# EAGLE board Arduino_on_a_PCB_v22 (1) (EAGLE 9.7.0)
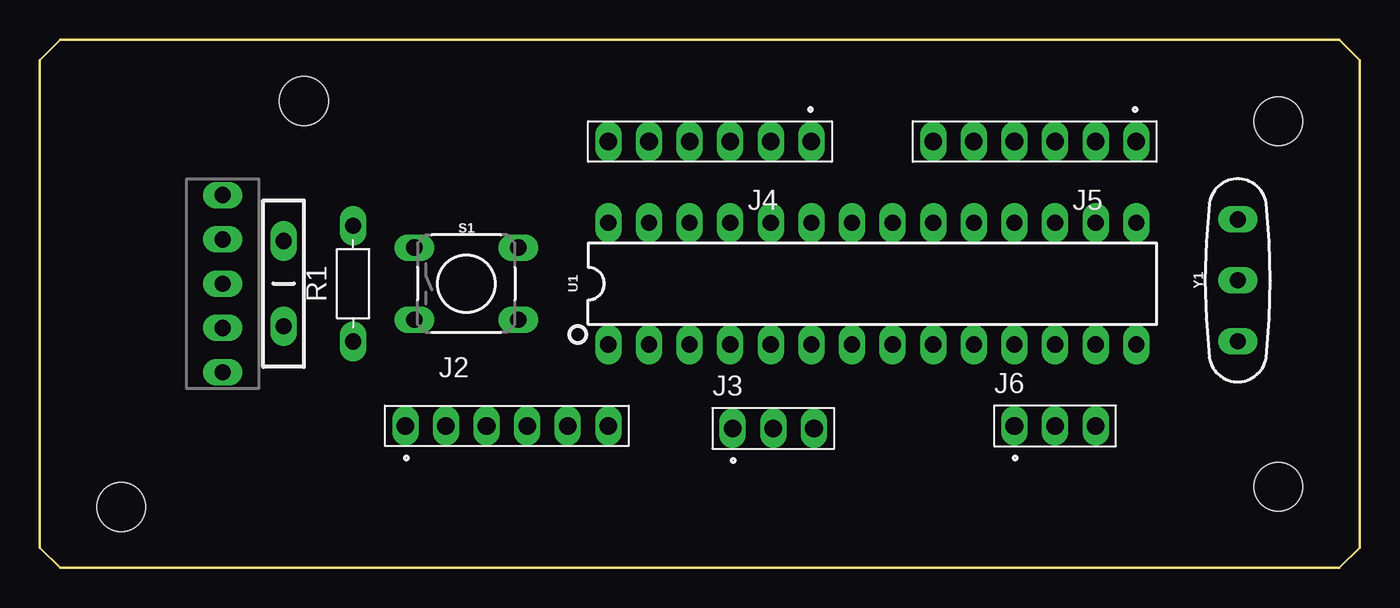
[diagram p0: board, top side]
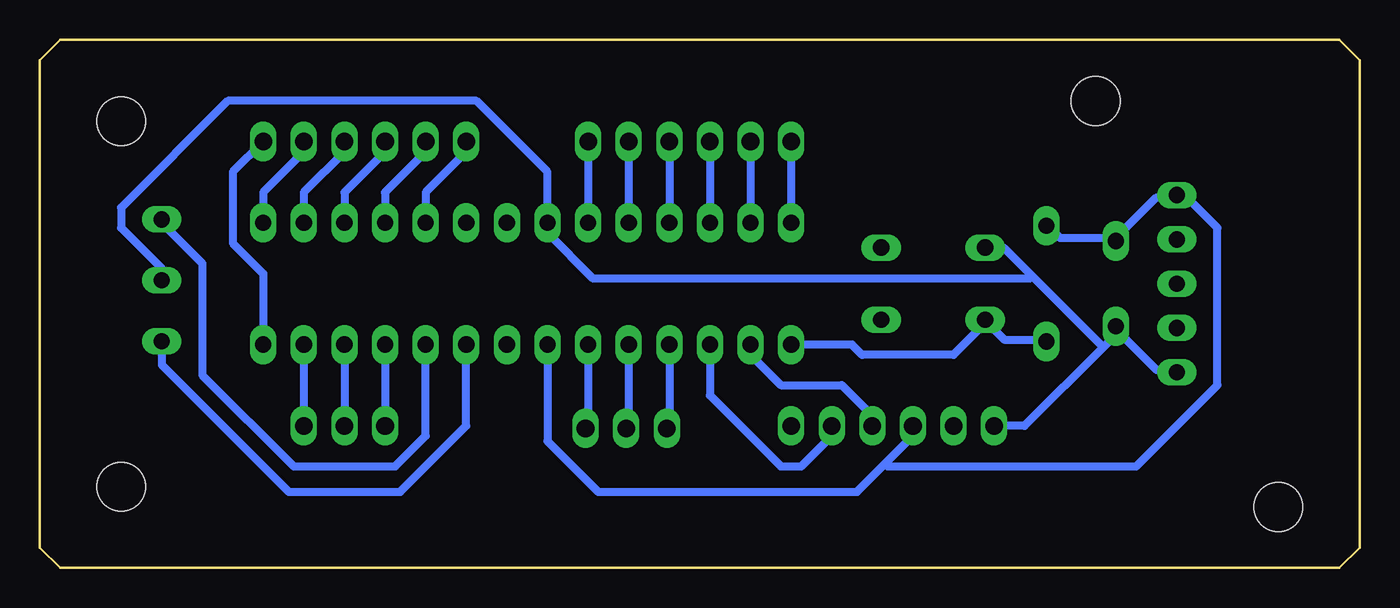
[diagram p1: board, bottom side, seen from below]

Size 82.55 x 33.02 mm. Coordinates in mm from the lower left corner, seen from the top.
Outline: 1.27,33.02 81.28,33.02 82.55,31.75 82.55,1.27 81.28,0 1.27,0 0,1.27 0,31.75 1.27,33.02
Copper layers (1*16): Top / Bottom
Stack-up Default Layer Stack: Top User Defined 0.035mm / Dielectric-1 User Defined 1.5mm / Bottom User Defined 0.035mm
Design rules "OthermillDRC_1_32_v2_RmNiVQ": minimum track width 8mil, minimum drill 0.8mm, track to track 0.794003125mm, track to pad 0.794003125mm, pad to pad 0.794003125mm, via to via 0.794003125mm, smd to smd 0mil, copper to edge 0mil, drill to drill 1mil, minimum pad ring 10mil, minimum via ring 10mil, stop-mask expansion 1mil, vias tented up to drill 30mil, thermal gap 10mil
Net classes: 0 default: width 0.508 mm, drill 0.508 mm, clearance 0.508 mm
Holes 3.05 mm at 77.47,27.94 77.47,5.08 5.08,3.81 16.51,29.21

## Footprints (pad centres in the part's own frame; a part is rotated, then mirrored left to right if it is on the bottom)
CAP-PTH-SMALL-KIT = drill 1.016 pad 1.651 long: 1 -2.667,0; 2 2.667,0
PIC_ICSP_MINI_5_PIN = drill 1.016 pad 1.651 long: 5V 5.54,0; D+ 0,0; D- 2.77,0; GND -5.54,0; ID -2.77,0
61300611121 = drill 1.1 pad 1.651 long: 1 -6.35,0; 2 -3.81,0; 3 -1.27,0; 4 1.27,0; 5 3.81,0; 6 6.35,0
61300311121 = drill 1.1 pad 1.651 long: 1 -2.54,0; 2 0,0; 3 2.54,0
RESAD724W46L381D178B = drill 1.016 pad 1.651 long: 1 -3.62,0; 2 3.62,0
TACTILE_SWITCH_PTH_6.0MM_KIT = drill 1.016 pad 1.651 long: 1 -3.251,2.261; 2 3.251,2.261; 3 -3.251,-2.261; 4 3.251,-2.261
DIP28 = drill 1.016 pad 1.651 long: 1 -16.51,-3.81; 2 -13.97,-3.81; 3 -11.43,-3.81; 4 -8.89,-3.81; 5 -6.35,-3.81; 6 -3.81,-3.81; 7 -1.27,-3.81; 8 1.27,-3.81; 9 3.81,-3.81; 10 6.35,-3.81; 11 8.89,-3.81; 12 11.43,-3.81; 13 13.97,-3.81; 14 16.51,-3.81; 15 16.51,3.81; 16 13.97,3.81; 17 11.43,3.81; 18 8.89,3.81; 19 6.35,3.81; 20 3.81,3.81; 21 1.27,3.81; 22 -1.27,3.81; 23 -3.81,3.81; 24 -6.35,3.81; 25 -8.89,3.81; 26 -11.43,3.81; 27 -13.97,3.81; 28 -16.51,3.81
RESONATOR-PTH-7.6X3.8 = drill 1.016 pad 1.651 long: 1 -3.81,0; 2 0,0; 3 3.81,0

## Placement (x,y rotation side)
C1  0.1uF  [CAP-PTH-SMALL-KIT]  15.24,17.78 90 top
J1  5-PIN_USB_CONNECTOR  [PIC_ICSP_MINI_5_PIN]  11.43,17.78 90 top
J2  61300611121  [61300611121]  29.21,8.89 0 top
J3  61300311121  [61300311121]  45.88,8.73 0 top
J4  61300611121  [61300611121]  41.91,26.67 180 top
J5  61300611121  [61300611121]  62.23,26.67 180 top
J6  61300311121  [61300311121]  63.5,8.89 0 top
R1  [RESAD724W46L381D178B]  19.59,17.78 90 top
S1  MOMENTARY-SWITCH-SPST-PTH-6.0MM-KIT  [TACTILE_SWITCH_PTH_6.0MM_KIT]  26.67,17.78 0 top
U1  328P  [DIP28]  52.07,17.78 0 top
Y1  [RESONATOR-PTH-7.6X3.8]  74.93,17.99 90 top

## Library data of the parts
C1 = Aaron Electronics Library; PROD_ID: CAP-08370
J1 = Aaron Electronics Library; PROD_ID: CONN-08314; SF_ID: PRT-11264
J2 J4 J5 = Aaron Electronics Library; CREATED_BY: PCBLayout.com; DIGI_KEY_PART_NUMBER: 732-5319-ND; MANUFACTURER: Wurth Electronics Inc.; MPN: 61300611121
J3 J6 = Aaron Electronics Library; CREATED_BY: PCBLayout.com; DIGI_KEY_PART_NUMBER: 732-5316-ND; MANUFACTURER: Wurth Electronics Inc.; MPN: 61300311121
R1 = Aaron Electronics Library; CATEGORY: Resistor; SUB-CATEGORY: Fixed
S1 = Aaron Electronics Library; PROD_ID: SWCH-08441; SF_SKU: COM-00097
U1 = Aaron Electronics Library; PROD_ID: IC-09136
Y1 = Aaron Electronics Library

## Nets
5V: C1.2 J1.5V J2.3 R1.2 U1.7
GND: C1.1 J1.GND J2.1 S1.1 U1.22 Y1.2
N$1: J3.1 U1.4
N$2: U1.9 Y1.1
N$3: R1.1 S1.3 U1.1
N$4: J3.2 U1.5
N$5: U1.10 Y1.3
N$6: J2.4 U1.2
N$7: J2.5 U1.3
N$8: J3.3 U1.6
N$9: J6.1 U1.11
N$10: J6.2 U1.12
N$11: J6.3 U1.13
N$12: J4.4 U1.26
N$13: J4.3 U1.25
N$14: U1.20
N$15: J4.6 U1.28
N$16: J4.5 U1.27
N$17: J4.2 U1.24
N$18: J4.1 U1.23
N$19: J5.1 U1.14
N$20: J5.2 U1.15
N$21: J5.3 U1.16
N$22: J5.4 U1.17
N$23: J5.5 U1.18
N$24: J5.6 U1.19
N$25: U1.8

## Tracks (layer width: path | path; a pad name or v marks a point on that pad's centre or on a via)
5V
  Bottom 0.508: 15.24,20.64 18.73,20.64 19.37,21.27 R1.2 | 11.43,23.18 12.7,23.18 15.24,20.64 | 15.24,20.64 C1.2 | J2.3 27.94,8.25 29.69,6.51 | 29.69,6.51 31.43,4.76 47.62,4.76 50.8,7.94 U1.7 | 11.43,23.18 10.79,23.18 8.89,21.27 8.89,11.43 13.97,6.35 29.53,6.35 29.69,6.51 | 11.43,23.18 J1.5V
GND
  Bottom 0.508: J1.GND 11.43,12.38 12.7,12.38 15.24,14.92 C1.1 15.24,14.61 16.03,13.81 | J2.1 20.96,8.89 16.03,13.81 | 16.03,13.81 20.48,18.26 | 20.48,18.26 22.22,20 23.18,20 S1.1 | 20.48,18.26 20.64,18.1 47.94,18.1 50.8,20.95 U1.22 50.8,24.77 55.24,29.21 70.8,29.21 77.47,22.54 77.47,21.27 74.93,18.73 Y1.2
N$1
  Bottom 0.508: U1.4 43.18,8.89 J3.1
N$2
  Bottom 0.508: U1.9 55.88,8.89 60.01,4.76 66.99,4.76 74.93,12.7 Y1.1
N$3
  Bottom 0.508: R1.1 19.68,14.29 22.22,14.29 23.18,15.24 S1.3 23.5,15.24 25.4,13.34 31.11,13.34 31.75,13.97 U1.1
N$4
  Bottom 0.508: U1.5 45.72,8.89 J3.2
N$5
  Bottom 0.508: U1.10 58.42,8.25 60.32,6.35 66.67,6.35 72.39,12.06 72.39,19.05 74.93,21.59 Y1.3
N$6
  Bottom 0.508: J2.4 30.48,9.52 32.39,11.43 36.19,11.43 38.1,13.34 U1.2
N$7
  Bottom 0.508: J2.5 33.02,8.25 34.92,6.35 36.19,6.35 40.64,10.8 U1.3
N$8
  Bottom 0.508: U1.6 48.26,8.89 J3.3
N$9
  Bottom 0.508: U1.11 J6.1
N$10
  Bottom 0.508: U1.12 J6.2
N$11
  Bottom 0.508: U1.13 J6.3
N$12
  Bottom 0.508: J4.4 U1.26
N$13
  Bottom 0.508: J4.3 U1.25
N$15
  Bottom 0.508: J4.6 U1.28
N$16
  Bottom 0.508: J4.5 U1.27
N$17
  Bottom 0.508: J4.2 U1.24
N$18
  Bottom 0.508: J4.1 U1.23
N$19
  Bottom 0.508: U1.14 68.58,18.41 70.48,20.32 70.48,24.77 J5.1
N$20
  Bottom 0.508: U1.15 68.58,23.49 66.04,26.04 J5.2
N$21
  Bottom 0.508: U1.16 66.04,23.49 63.5,26.04 J5.3
N$22
  Bottom 0.508: U1.17 63.5,23.49 60.96,26.04 J5.4
N$23
  Bottom 0.508: U1.18 60.96,23.49 58.42,26.04 J5.5
N$24
  Bottom 0.508: U1.19 58.42,23.49 55.88,26.04 J5.6